# Altium PCB Flow_Pump.PcbDoc (part 3 of 3)
Units mm, origin at the board's own origin, x right, y up, seen from the top; angles counter-clockwise.
Board outline 210 x 210 mm, 2 copper layers (Top Layer, Bottom Layer); 275 components, 189 nets, 896 pads, 730 vias.
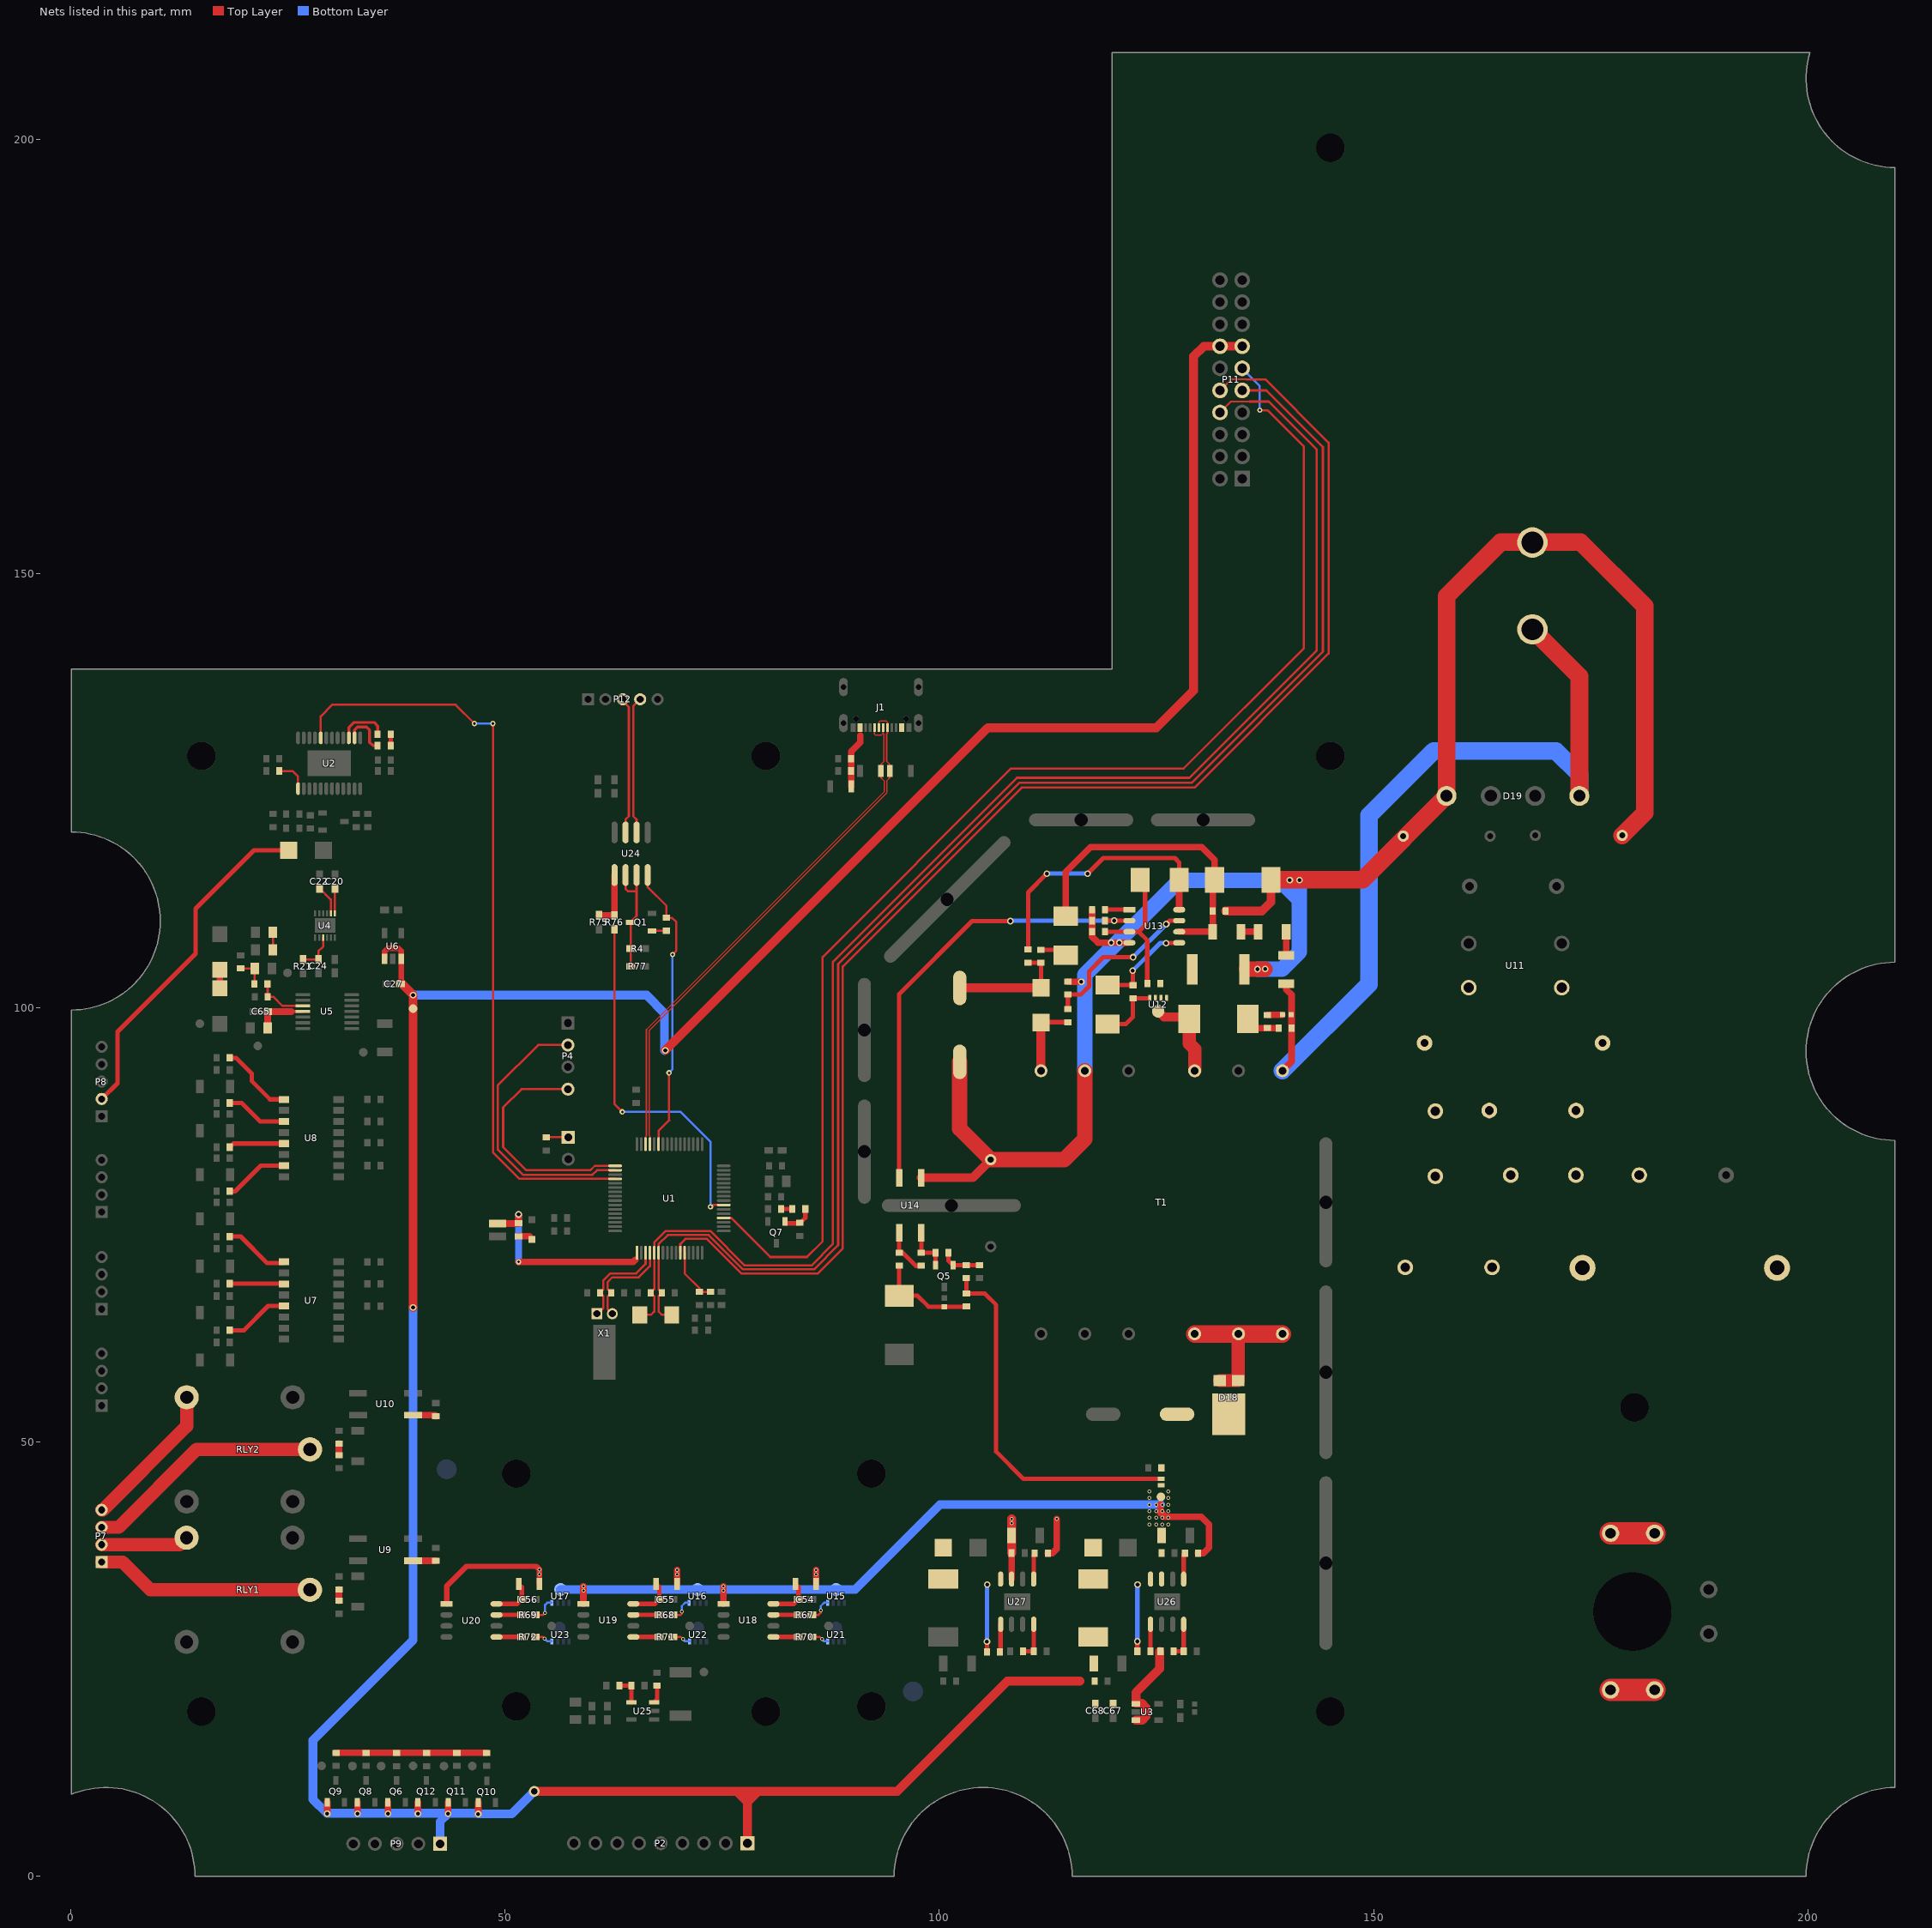
[diagram p3: the nets of this part, all layers, seen from the top]

## Via types
v1: diameter 0.762, hole 0.457, Top Layer to Bottom Layer, tented both sides, 554 vias
v2: diameter 0.61, hole 0.305, Top Layer to Bottom Layer, tented both sides, 99 vias
v3: diameter 0.45, hole 0.25, Top Layer to Bottom Layer, tented both sides, 70 vias
v4: diameter 0.5, hole 0.25, Top Layer to Bottom Layer, 4 vias
v5: diameter 1.5, hole 1, Top Layer to Bottom Layer, 2 vias
v6: diameter 1.27, hole 0.711, Top Layer to Bottom Layer, tented both sides, 1 vias

## Nets (pads, with @x,y where several pads share a name; then routed paths per layer and width w, separated by ;. In a path a pad name is that pad's centre, name@x,y a point inside that pad or via, vN(x,y) a via of type N, cw(c..) or ccw(c..) an arc to the next point about the centre after c; other vN are vias at no path point) (continued)
NetC22_1: C22.1 U4.2 | length 3.5
  Top Layer w0.254: C22.1@28.643,113.685 C22.1@28.643,113.751 29.953,112.441 U4.2@29.953,110.874
NetC23_1: C23.1 R22.1 R23.2 | length 3.4
  Top Layer w0.254: R22.1@19.558,104.521 21.179,104.521 21.179,102.758 R23.2@21.15,102.729
NetC24_1: C24.1 R21.2 U4.9 | length 4.5
  Top Layer w0.254: R21.2@26.738,105.562 C24.1@28.516,105.562 28.516,106.494 29.053,107.031 U4.9@29.053,108.074
NetC25_2: C25.2 R23.1 U5.3 | length 6
  Top Layer w0.254: R23.1@22.65,102.729 22.674,102.706 C25.2@22.674,101.242 23.345,101.242 24.37,100.217 U5.3@26.712,100.217
NetC38_2: C38.2 R42.1 | length 1.3
  Top Layer w0.762: R42.1@30.881,31.731 C38.2@30.881,33.025
NetC39_2: C39.2 R43.1 | length 1.3
  Top Layer w0.762: R43.1@30.881,48.495 C39.2@30.881,49.813
NetC40_1: C40.1 C41.1 D18.3 R61.1 R64.1 T2.1 | length 42.9
  Top Layer w0.508: R64.1@103.122,68.871 103.124,68.869 R61.1@103.124,67.107 105.232,67.107 106.553,65.786 106.553,48.895 109.683,45.765 T2.1@125.553,45.765
NetC42_1: C42.1 C44.1 D19.1 R47.2 R50.2 T1.1 | length 95.3
  Top Layer w0.762: T1.1@139.511,92.747 140.565,93.801 R47.2@140.565,97.663 140.565,101.497 139.952,102.11 R50.2@139.952,102.78
  Top Layer w2.032: C44.1@169.253,142.608 173.705,138.156 D19.1@173.705,124.384
  Bottom Layer w2.032: T1.1@139.511,92.747 149.479,102.715 149.479,122.123 156.921,129.565 170.993,129.565 173.73,126.828 D19.1@173.73,124.308
NetC42_2: C42.2 R51.2 | length 1.7
  Top Layer w0.762: R51.2@137.819,99.187 C42.2@139.511,99.187
NetC45_1: C45.1 C49.1 D21.2 R56.1 U13.6 | length 36.2
  Top Layer w0.762: D21.2@114.554,110.545 114.554,115.621 117.424,118.491 130.226,118.491 131.697,117.02 C49.1@131.697,114.718 131.495,114.516 R56.1@131.495,108.749 U13.6@127.633,108.749
NetC46_1: C46.1 D22.2 R55.1 R57.1 | length 13.7
  Top Layer w0.508: R57.1@110.234,105.193 111.698,105.193 R55.1@111.711,105.18 D22.2@111.711,102.298
  Top Layer w1.016: C46.1@102.36,102.272 102.386,102.298 D22.2@111.711,102.298
NetC47_1: C47.1 U13.1 | length 2.8
  Top Layer w0.508: C47.1@119.1,111.289 U13.1@121.883,111.289
NetC48_1: C48.1 D24.2 R61.2 R63.1 | length 11.7
  Top Layer w0.508: R63.1@95.391,70.292 D24.2@95.391,66.839 97.499,66.839 98.753,65.585 C48.1@100.582,65.585 103.026,65.585 R61.2@103.124,65.683
NetC50_1: C50.1 U13.2 U14.4 | length 52.2
  Top Layer w0.508: U14.4@95.391,80.403 95.391,101.589 103.776,109.974 v1(108.204,109.974) ; C50.1@119.1,110.019 v1(120.142,110.019) U13.2@121.883,110.019
  Bottom Layer w0.508: v1(108.204,109.974) 108.249,110.019 v1(120.142,110.019)
NetC51_1: C51.1 D25.2 R62.2 U13.3 | length 16.8
  Top Layer w0.508: C51.1@119.1,108.749 U13.3@121.883,108.749 122.969,108.749 ; D25.2@123.133,114.718 123.698,114.153 123.698,109.478 122.969,108.749 ; R62.2@123.952,102.78 123.952,107.766 122.969,108.749
NetC52_1: C52.1 Q5.2 R65.2 U14.2 | length 5.4
  Top Layer w0.508: U14.2@97.931,74.078 R65.2@97.931,71.792 C52.1@99.566,71.792 99.566,70.371 Q5.2@99.582,70.355
NetC52_2: C52.2 Q5.1 R64.2 R66.1 | length 4.7
  Top Layer w0.508: C52.2@101.066,71.792 101.066,70.871 Q5.1@101.582,70.355 104.63,70.355 R66.1@104.646,70.371
NetC53_2: C53.2 R73.2 U1.12 | length 6.5
  Top Layer w0.254: U1.12@70.684,71.795 70.684,69.397 72.39,67.691 C53.2@72.39,67.286 R73.2@73.66,67.286
NetC54_2: C54.2 D26.2 U18.8 | length 5
  Top Layer w0.508: U18.8@80.909,31.374 83.281,31.374 C54.2@83.789,31.882 83.789,33.299 D26.2@83.427,33.66
NetC55_2: C55.2 D27.2 U19.8 | length 5.1
  Top Layer w0.508: U19.8@64.78,31.374 67.265,31.374 C55.2@67.773,31.882 67.773,33.299 D27.2@67.412,33.66
NetC56_2: C56.2 D28.2 U20.8 | length 5.1
  Top Layer w0.508: U20.8@49.022,31.369 51.425,31.369 C56.2@51.938,31.882 51.938,33.299 D28.2@51.576,33.66
NetC63_1: C63.1 P3.1 P3.2 R48.2 R49.1 R52.1 U11.2 | length 5.1
  Top Layer w2.54: P3.2@177.292,21.463 P3.1@182.372,21.463
NetC63_2: C63.2 F1.2 R46.2 R48.1 R49.2 U11.1
NetC72_1: C72.1 D29.2 L1.1 U26.8 | length 7.7
  Top Layer w0.508: C72.1@122.809,25.908 v1(122.809,27.051)
  Bottom Layer w0.508: v1(122.809,27.051) 122.809,33.579 v1(122.834,33.604)
NetC72_2: C72.2 U26.1 | length 3.1
  Top Layer w0.508: C72.2@124.309,25.908 124.333,25.932 U26.1@124.333,29.023
NetC77_1: C77.1 D30.2 L2.1 U27.8 | length 7.8
  Top Layer w0.508: C77.1@105.49,25.852 v1(105.49,27.03)
  Bottom Layer w0.508: v1(105.49,27.03) 105.49,33.583 v1(105.512,33.604)
NetC77_2: C77.2 U27.1 | length 3.2
  Top Layer w0.508: C77.2@106.99,25.852 107.061,25.923 U27.1@107.061,29.023
NetD1_2: D1.2 R1.1 | length 1.6
  Top Layer w0.762: R1.1@51.562,73.684 52.808,73.684 D1.2@53.086,73.406
NetD6_2: D6.2 D7.1 | length 2.1
  Top Layer w0.762: D6.2@17.166,102.253 D7.1@17.166,104.376
NetD18_1: D18.1 D18.2 T1.10 T1.11 T1.12 | length 17.6
  Top Layer w1.524: D18.2@132.3,57.079 D18.1@134.4,57.079 134.4,62.386 T1.11@134.461,62.447
  Top Layer w2.032: T1.10@129.411,62.447 T1.11@134.461,62.447 T1.12@139.511,62.447
NetD20_1: D20.1 T1.3 U12.5 | length 10.2
  Top Layer w1.016: U12.5@125.196,99.605 125.868,98.933 128.559,98.933 D20.1@128.776,98.716
  Top Layer w1.524: D20.1@128.776,98.716 128.776,95.887 129.411,95.252 T1.3@129.411,92.747
NetD20_2: D20.2 R47.1 R51.1 | length 4
  Top Layer w0.762: D20.2@135.526,98.716 136.579,97.663 R51.1@137.795,97.663 R47.1@139.065,97.663
NetD21_1: D21.1 R55.2 | length 3.1
  Top Layer w0.508: R55.2@111.711,106.68 113.919,106.68 D21.1@114.554,106.045
NetD22_1: D22.1 R58.1 T1.6 | length 8.7
  Top Layer w0.508: D22.1@111.711,98.298 111.748,98.335 R58.1@114.806,98.335
  Top Layer w1.016: T1.6@111.711,92.747 D22.1@111.711,98.298
NetD23_1: D23.1 R60.1 U12.4 | length 7.2
  Top Layer w0.508: D23.1@119.38,98.116 121.484,98.116 122.301,98.933 R60.1@122.301,101.092 U12.4@124.087,101.092
NetD23_2: D23.2 R60.2 U13.5 | length 11.3
  Top Layer w0.508: D23.2@119.38,102.616 122.277,102.616 R60.2@122.301,102.592 122.276,102.617 v1(122.276,104.267) ; v1(126.111,107.442) 127.596,107.442 U13.5@127.633,107.479
  Bottom Layer w0.508: v1(122.276,104.267) 125.451,107.442 v1(126.111,107.442)
NetD25_1: D25.1 R57.2 U13.8 | length 31.3
  Top Layer w0.508: R57.2@110.234,106.693 110.234,113.282 v1(112.395,115.443) ; v1(117.094,115.443) 118.872,117.221 127.127,117.221 127.633,116.715 D25.1@127.633,114.718 D25.1@127.633,114.3
  Top Layer w0.762: U13.8@127.633,111.289 D25.1@127.633,114.3
  Bottom Layer w0.508: v1(112.395,115.443) v1(117.094,115.443)
NetF1_1: F1.1 P10.1 P10.2 | length 5.1
  Top Layer w2.54: P10.2@177.292,39.497 P10.1@182.372,39.497
NetLED1_1: LED1.1 R15.2 | length 1.3
  Top Layer w0.508: R15.2@36.83,130.175 LED1.1@36.83,131.475
NetLED1_2: LED1.2 U2.3 | length 5.9
  Top Layer w0.33: U2.3@32.025,131.068 32.025,132.265 32.602,132.842 34.925,132.842 35.33,132.437 LED1.2@35.33,131.475
NetP1_1: P1.1 R2.2 | length 2.5
  Top Layer w0.254: R2.2@54.762,85.09 P1.1@57.277,85.09
NetQ1_1: Q1.1 R5.2 | length 1.7
  Top Layer w0.254: Q1.1@66.929,108.842 68.559,108.842 R5.2@68.58,108.863
NetQ7_1: Q7.1 R84.2 R85.1 | length 3.6
  Top Layer w0.508: Q7.1@82.264,75.184 83.947,75.184 84.582,75.819 R84.2@84.582,76.835
NetR1_2: R1.2 SC1.1 U1.1 | length 23.2
  Top Layer w0.254: 65.184,70.993 U1.1@65.184,71.795
  Top Layer w0.762: SC1.1@49.146,75.159 51.537,75.159 R1.2@51.562,75.184 v1(51.562,76.2) ; v2(51.562,70.739) 64.747,70.739 65.001,70.993
  Bottom Layer w0.762: v2(51.562,70.739) v1(51.562,76.2)
NetR15_1: R15.1 U2.2 | length 5.4
  Top Layer w0.33: U2.2@32.675,131.068 32.675,131.984 32.999,132.309 34.061,132.309 34.417,131.953 34.417,130.556 34.798,130.175 R15.1@35.33,130.175
NetR16_1: R16.1 U2.13 | length 3.8
  Top Layer w0.254: R16.1@24.011,127.254 25.527,127.254 26.175,126.606 U2.13@26.175,125.218
NetR17_1: R17.1 R87.2 U26.4 | length 4.3
  Top Layer w0.508: R87.2@126.975,25.908 R17.1@128.143,25.908 U26.4@128.143,29.023
NetR19_1: R19.1 R20.2 | length 2
  Top Layer w0.254: R19.1@23.269,106.664 R20.2@23.269,108.696
NetR26_1: R26.1 U7.1 | length 7.5
  Top Layer w0.508: R26.1@18.304,73.66 19.558,73.66 22.606,70.612 U7.1@24.542,70.612
NetR28_1: R28.1 U8.1 | length 8.7
  Top Layer w0.508: R28.1@18.304,94.234 19.025,94.234 20.828,92.431 20.828,91.567 22.95,89.445 U8.1@24.542,89.445
NetR30_1: R30.1 U7.3 | length 6.3
  Top Layer w0.508: R30.1@18.304,68.236 24.505,68.236 U7.3@24.542,68.199
NetR32_1: R32.1 U8.3 | length 7.1
  Top Layer w0.508: R32.1@18.304,89.027 19.685,89.027 21.807,86.905 U8.3@24.542,86.905
NetR34_1: R34.1 U7.5 | length 7.4
  Top Layer w0.508: R34.1@18.304,62.865 19.939,62.865 22.733,65.659 U7.5@24.542,65.659
NetR36_1: R36.1 U8.5 | length 6.4
  Top Layer w0.508: R36.1@18.304,83.947 18.722,84.365 U8.5@24.542,84.365
NetR40_1: R40.1 U8.7 | length 7.5
  Top Layer w0.508: R40.1@18.304,78.867 18.923,78.867 21.881,81.825 U8.7@24.542,81.825
NetR44_1: R44.1 U9.1 | length 2.6
  Top Layer w0.762: U9.1@39.418,36.327 R44.1@42.037,36.327
NetR45_1: R45.1 U10.1 | length 2.7
  Top Layer w0.762: U10.1@39.418,53.091 41.929,53.091 R45.1@42.037,52.983
NetR46_1: R46.1 R52.2 R53.2
NetR50_1: R50.1 R54.2 | length 2.7
  Top Layer w0.762: R50.1@139.952,106.03 R54.2@139.952,108.749
NetR54_1: R54.1 R56.2 | length 2
  Top Layer w0.762: R56.2@134.745,108.749 R54.1@136.702,108.749
NetR58_2: R58.2 R59.1 U13.7 | length 19
  Top Layer w0.508: R58.2@114.806,99.835 R59.1@114.806,101.51 116.29,101.51 117.246,102.466 117.246,104.167 118.895,105.816 v1(122.326,105.816) ; v1(126.136,109.626) 126.529,110.019 U13.7@127.633,110.019
  Bottom Layer w0.508: v1(122.326,105.816) v1(126.136,109.626)
NetR62_1: R62.1 R81.1 U12.1 U12.2 U12.3
NetR63_2: R63.2 R65.1 U14.1 | length 5.4
  Top Layer w0.508: U14.1@95.391,74.078 R63.2@95.391,71.792 95.792,71.792 97.292,70.292 R65.1@97.931,70.292
NetR67_1: R67.1 U18.7 | length 2.9
  Top Layer w0.508: U18.7@80.909,30.104 R67.1@83.764,30.104
NetR67_2: R67.2 U15.4 | length 2.8
  Top Layer w0.254: R67.2@85.338,30.104 86.106,30.104 86.36,30.358 v3(86.36,30.607)
  Bottom Layer w0.254: v3(86.36,30.607) 86.36,31.12 86.736,31.496 U15.4@87.145,31.496
NetR68_1: R68.1 U19.7 | length 3
  Top Layer w0.508: U19.7@64.78,30.104 R68.1@67.748,30.104
NetR68_2: R68.2 U16.4 | length 2.9
  Top Layer w0.254: R68.2@69.322,30.104 70.231,30.104 70.358,30.231 v3(70.358,30.48)
  Bottom Layer w0.254: v3(70.358,30.48) 70.358,31.12 70.734,31.496 U16.4@71.161,31.496
NetR69_1: R69.1 U20.7 | length 2.9
  Top Layer w0.508: U20.7@49.022,30.099 51.908,30.099 R69.1@51.913,30.104
NetR69_2: R69.2 U17.4 | length 3
  Top Layer w0.254: R69.2@53.487,30.104 54.361,30.104 v3(54.61,30.353)
  Bottom Layer w0.254: v3(54.61,30.353) 54.61,31.247 54.859,31.496 U17.4@55.413,31.496
NetR70_1: R70.1 U18.5 | length 2.9
  Top Layer w0.508: U18.5@80.909,27.564 R70.1@83.764,27.564
NetR70_2: R70.2 U21.4 | length 2
  Top Layer w0.254: R70.2@85.364,27.564 86.228,27.564 v3(86.487,27.305)
  Bottom Layer w0.254: v3(86.487,27.305) 86.741,27.051 U21.4@87.145,27.051
NetR71_1: R71.1 U19.5 | length 3
  Top Layer w0.508: U19.5@64.78,27.564 R71.1@67.748,27.564
NetR71_2: R71.2 U22.4 | length 2.1
  Top Layer w0.254: R71.2@69.362,27.564 70.226,27.564 v3(70.485,27.305)
  Bottom Layer w0.254: v3(70.485,27.305) 70.739,27.051 U22.4@71.288,27.051
NetR72_1: R72.1 U20.5 | length 2.9
  Top Layer w0.508: U20.5@49.022,27.559 51.908,27.559 R72.1@51.913,27.564
NetR72_2: R72.2 U23.4 | length 2.1
  Top Layer w0.254: R72.2@53.487,27.564 54.351,27.564 v3(54.559,27.356)
  Bottom Layer w0.254: v3(54.559,27.356) 54.864,27.051 U23.4@55.413,27.051
NetR78_2: R78.2 R79.1 U25.4 | length 3.3
  Top Layer w0.508: R79.1@63.167,21.96 R78.2@64.558,21.96 U25.4@64.558,20.039
NetR80_1: R80.1 U25.3 | length 2.1
  Top Layer w0.508: U25.3@67.158,20.039 67.509,20.39 R80.1@67.509,21.96
NetR83_2: R83.2 R84.1 | length 1.3
  Top Layer w0.508: R83.2@81.788,76.835 R84.1@83.082,76.835
NetR88_1: R88.1 U26.5 | length 3.1
  Top Layer w0.508: U26.5@128.143,34.223 128.143,37.06 R88.1@128.294,37.211
NetR89_1: R89.1 R90.2 U27.4 | length 4.3
  Top Layer w0.508: R90.2@109.653,25.908 R89.1@110.871,25.908 U27.4@110.871,29.023
NetR91_1: R91.1 U27.5 | length 3
  Top Layer w0.508: U27.5@110.871,34.223 110.871,37.084 R91.1@110.998,37.211
op_3.3v: C65.1 FB2.2 U5.4 | length 5.9
  Top Layer w0.33: 25.385,99.552 25.4,99.567 U5.4@26.712,99.567
  Top Layer w0.762: FB2.2@22.674,97.662 C65.1@22.674,99.552 25.385,99.552
osc_in: C5.1 U1.3 X1.2 | length 11.2
  Top Layer w0.254: X1.2@60.796,64.86 61.341,65.405 61.341,66.802 C5.1@60.96,67.183 61.341,67.564 61.341,68.617 62.142,69.418 65.1,69.418 66.184,70.502 U1.3@66.184,71.795
osc_out: C6.1 U1.4 X1.1 | length 11.4
  Top Layer w0.254: X1.1@62.357,64.77 61.812,65.315 61.812,66.765 C6.1@62.23,67.183 61.798,67.615 61.798,68.402 62.357,68.961 65.405,68.961 66.684,70.24 U1.4@66.684,71.795
PGND: C43.1 C44.2 C45.2 C46.2 C47.2 C49.2 C50.2 C51.2 C58.2 C64.2 D19.4 R59.2 R81.2 T1.5 U13.4 U14.3 | length 221
  Top Layer w0.762: R59.2@114.806,103.01 114.819,102.997 v1(116.357,102.997) ; C47.2@117.6,111.289 C50.2@117.6,110.019 C51.2@117.6,108.749 117.6,108.181 118.302,107.479 U13.4@121.883,107.479
  Top Layer w1.016: U14.3@97.931,80.428 103.844,80.428 C64.2@105.918,82.502 ; C45.2@132.969,111.125 137.16,111.125 138.197,112.162 C49.2@138.197,114.718
  Top Layer w1.778: C46.2@102.36,93.772 102.36,86.06 C64.2@105.918,82.502 114.379,82.502 116.761,84.884 T1.5@116.761,92.747 ; R81.2@135.382,104.431 135.396,104.445 v1@137.516,104.445
  Top Layer w2.032: C49.2@138.197,114.718 148.739,114.718 158.43,124.409 158.43,147.381 164.661,153.612 173.845,153.612 181.229,146.228 181.229,122.432 C43.1@178.634,119.837
  Bottom Layer w1.778: T1.5@116.761,92.747 116.761,103.789 127.653,114.681 v1(140.36,114.681) v1(141.478,114.681) 141.478,106.426 139.483,104.431 139.469,104.445 v1(136.652,104.445) ; 139.268,114.63 141.263,112.635
  other v1: 137.516,104.47 119.812,107.493 120.726,107.493
relay_A1: P7.3 RLY2.5 | length 27.7
  Top Layer w1.524: P7.3@3.556,40.186 5.515,40.186 14.478,49.149 RLY2.5@27.547,49.149
relay_A2: P7.1 RLY1.5 | length 25.3
  Top Layer w1.524: P7.1@3.556,36.186 5.978,36.186 9.174,32.99 RLY1.5@27.535,32.99
relay_B1: P7.4 RLY2.2 | length 17.1
  Top Layer w1.524: P7.4@3.556,42.186 3.705,42.186 13.347,51.828 RLY2.2@13.347,55.148
relay_B2: P7.2 RLY1.2 | length 10.1
  Top Layer w1.524: P7.2@3.556,38.186 12.532,38.186 RLY1.2@13.335,38.989
RS232RX/485-_N: P12.3 U24.7 | length 15.8
  Top Layer w0.254: P12.3@63.564,135.509 63.564,135.318 64.262,134.62 64.262,122.047 63.881,121.666 U24.7@63.881,120.179
RS232TX/485+_P: P12.4 U24.6 | length 15.8
  Top Layer w0.254: U24.6@65.151,120.179 65.151,121.666 64.77,122.047 64.77,134.715 P12.4@65.564,135.509
RS485_DIR: Q1.3 R4.1 R77.2 U24.2 U24.3 | length 13.8
  Top Layer w0.254: U24.2@63.881,115.279 63.881,113.665 64.135,113.411 65.151,113.411 ; R77.2@64.491,104.775 R4.1@64.491,106.807 64.491,109.78 Q1.3@64.429,109.842 65.151,110.564 65.151,113.411 ; U24.3@65.151,115.279 65.151,113.411
RUN: P11.10 U1.11 | length 166.4
  Top Layer w0.203: P11.10@132.334,171.069 133.604,172.339 135.416,172.339
  Top Layer w0.254: U1.11@70.184,71.795 70.184,72.789 70.775,73.381 73.254,73.381 77.241,69.393 86.004,69.393 88.9,72.288 88.9,104.75 109.499,125.349 129.388,125.349 144.831,140.792 144.831,165.049 137.541,172.339 135.416,172.339
RX_5V: R75.1 R76.1 U24.1 | length 6.5
  Top Layer w0.762: R75.1@60.833,110.642 62.586,110.642 R76.1@62.611,110.617 U24.1@62.611,115.279
SCLK_AO: U1.52 U2.8 | length 88.5
  Top Layer w0.254: U2.8@28.775,131.068 28.775,133.55 30.099,134.874 44.323,134.874 v2(46.482,132.715) ; v2(48.616,132.715) 48.616,83.337 51.658,80.295 U1.52@62.684,80.295
  Bottom Layer w0.254: v2(46.482,132.715) v2(48.616,132.715)
SIOUT0: D5.2 P8.2 | length 39.9
  Top Layer w0.508: P8.2@3.556,89.494 5.372,91.31 5.372,97.218 14.376,106.223 14.376,111.404 21.082,118.11 D5.2@25.083,118.11
SW1: C1.1 P11.8 U1.5 Y1.1 | length 174
  Top Layer w0.203: P11.8@132.334,168.529 133.59,169.785 135.763,169.785
  Top Layer w0.254: Y1.1@65.509,64.643 66.802,64.643 67.183,65.024 67.183,66.788 C1.1@66.788,67.183 67.184,67.579 U1.5@67.184,71.795 67.184,72.969 68.51,74.295 73.635,74.295 77.597,70.333 85.279,70.333 87.757,72.811 87.757,105.283 108.941,126.467 128.803,126.467 143.459,141.122 143.459,164.262 137.936,169.785 135.763,169.785
SW2: C2.1 P11.9 U1.6 Y1.2 | length 172.3
  Top Layer w0.254: Y1.2@69.209,64.643 68.072,64.643 67.691,65.024 67.691,66.825 C2.1@68.049,67.183 67.684,67.548 U1.6@67.684,71.795 67.684,72.779 68.743,73.838 73.457,73.838 77.419,69.875 85.573,69.875 88.362,72.665 88.362,105.024 109.22,125.882 129.057,125.882 144.17,140.995 144.17,164.567 137.668,171.069 P11.9@134.874,171.069
SWCLK: P4.2 U1.50 | length 32.3
  Top Layer w0.254: P4.2@57.252,95.707 53.818,95.707 49.149,91.038 49.149,83.693 52.07,80.772 60.071,80.772 60.591,81.292 62.684,81.292 U1.50@62.684,81.295
SWD: P4.4 U1.49 | length 27.1
  Top Layer w0.254: P4.4@57.252,90.627 51.892,90.627 49.784,88.519 49.784,83.947 52.436,81.295 59.832,81.295 60.332,81.795 U1.49@62.684,81.795
uart1_rx: R76.2 U1.23 | length 42.1
  Top Layer w0.254: R76.2@62.611,109.043 62.611,88.9 v2(63.5,88.011) ; v2(73.66,77.089) 73.866,77.295 U1.23@75.184,77.295
  Bottom Layer w0.254: v2(63.5,88.011) 70.231,88.011 73.66,84.582 v2(73.66,77.089)
uart1_tx: R5.1 U1.43 U24.4 | length 33.6
  Top Layer w0.254: U24.4@66.421,115.279 66.421,113.896 68.58,111.737 R5.1@68.58,110.363 69.215,110.363 69.723,109.855 69.723,106.553 v2(69.291,106.121) ; U1.43@67.684,84.295 67.684,85.82 68.91,87.046 68.885,87.071 v2(68.885,92.507)
  Bottom Layer w0.254: v2(68.885,92.507) 69.291,92.913 v2(69.291,106.121)
USB_N: D3.2 J1.A7 J1.B7 U1.45 | length 62
  Top Layer w0.152: U1.45@66.684,84.295 66.684,85.171 66.586,85.269 66.586,97.356 93.953,124.723 93.953,126.136 94.32,126.503 D3.2@94.32,127.254 94.32,128.005 93.943,128.382 93.943,131.518 94.041,131.615 J1.B7@94.041,132.232 94.041,132.883 93.929,132.994 93.167,132.994 93.041,132.868 J1.A7@93.041,132.232
USB_P: D4.2 J1.A6 J1.B6 U1.46 | length 61.5
  Top Layer w0.152: U1.46@66.184,84.295 66.184,85.171 66.282,85.269 66.282,97.483 93.648,124.849 93.648,126.136 93.281,126.503 D4.2@93.281,127.254 93.281,128.005 93.639,128.363 93.639,131.518 93.541,131.615 ; J1.B6@92.541,132.232 92.541,131.512 92.685,131.369 93.294,131.369 93.541,131.615 ; J1.A6@93.541,132.232 93.541,131.615
V_Power: C71.1 C73.2 C76.1 C78.2 D26.1 D27.1 D28.1 R88.2 R91.2 T2.2 T4.1 U15.5 U16.5 U17.5 U18.1 U19.1 U20.1 U26.7 U27.7 | length 118.8
  Top Layer w0.635: U20.1@43.272,31.369 43.272,33.391 45.568,35.687 53.594,35.687 v3(53.976,35.305) D28.1@53.976,33.66
  Top Layer w0.762: U19.1@59.03,31.374 v3(59.03,33.401) ; D27.1@69.812,33.66 v3(69.812,35.268) ; U18.1@75.159,31.374 v3(75.159,33.401) ; D26.1@85.827,33.66 v3(85.827,35.268) ; U27.7@108.331,34.223 C78.2@108.331,37.221 ; R91.2@112.498,37.211 113.03,37.211 113.538,37.719 v3(113.538,41.148) ; 125.476,41.783 v3@125.476,42.799 ; 125.67,41.783 126.051,41.402 ; 125.857,41.402 130.175,41.402 131.064,40.513 131.064,37.846 130.429,37.211 R88.2@129.794,37.211
  Top Layer w1.016: C78.2@108.331,37.221 C76.1@108.331,39.253 v3(108.331,41.148)
  Bottom Layer w1.016: U17.5@56.388,33.026 U15.5@88.12,33.026 90.303,33.026 100.076,42.799 v3@125.476,42.799
  other v3: 59.03,32.893 75.159,32.893 53.975,34.798 69.812,34.798 85.827,34.798 124.206,40.513 124.968,40.513 125.67,40.513 126.365,40.513 108.331,40.64 124.206,41.275 124.968,41.275 125.67,41.275 126.365,41.275 124.206,42.037 124.968,42.037 125.67,42.037 126.365,42.037 124.206,42.799 124.968,42.799 125.67,42.799 126.365,42.799 124.206,43.561 126.365,43.561 124.206,44.323 126.365,44.323
V_REF: C20.1 U4.1 | length 2.9
  Top Layer w0.254: U4.1@30.403,110.874 30.403,113.733 C20.1@30.421,113.751
VCC_5V: C27.1 C67.1 C68.1 C74.2 C75.1 L1.2 P2.1 P9.1 P11.13 P11.14 Q6.1 Q8.1 Q9.1 Q10.1 Q11.1 Q12.1 R87.1 T6.1 U3.1 U3.3 U6.1 U6.3 | length 390.1
  Top Layer w0.635: U6.1@36.138,105.623 36.138,106.47 36.5,106.832 37.744,106.832 38.038,106.539 U6.3@38.038,105.623 C27.1@38.038,102.822
  Top Layer w0.762: v1(29.531,7.223) Q9.1@29.531,8.543 ; v1(33.01,7.223) Q8.1@33.01,8.543 ; v1(36.516,7.223) Q6.1@36.516,8.543 ; v1(39.968,7.223) Q12.1@39.968,8.543 ; v1(43.45,7.223) Q11.1@43.45,8.543 ; v1(46.914,7.183) Q10.1@46.914,8.503
  Top Layer w1.016: C27.1@38.038,102.822 v1(39.421,101.439) T6.1@39.421,99.898 v1(39.421,65.507) ; v6(53.365,9.779) 78.003,9.779 ; v1@68.478,95.123 105.588,132.232 124.993,132.232 129.286,136.525 129.286,174.981 130.454,176.149 P11.14@132.334,176.149 P11.13@134.874,176.149 ; 76.683,9.779 77.918,8.543 79.154,9.779 ; P2.1@77.92,3.81 77.92,9.696 78.003,9.779 ; 116.205,22.479 107.848,22.479 95.148,9.779 78.003,9.779 ; U3.3@122.652,17.973 123.383,17.973 123.825,18.415 123.825,19.431 123.317,19.939 122.652,19.939 122.652,21.179 125.373,23.9 R87.1@125.373,25.908
  Bottom Layer w1.016: v1(39.421,65.507) 39.421,27.203 27.889,15.672 27.889,8.865 29.489,7.264 v1@46.965,7.264 ; v1(39.421,101.439) 66.303,101.439 68.351,99.391 v1@68.351,95.072 ; P9.1@42.527,3.75 42.527,6.3 v1(43.45,7.223) ; v1(46.914,7.183) 50.77,7.183 v6(53.365,9.779)
  other v1: 68.453,95.072
VCC_MCU_3.3V: R24.1 R38.1 R39.1 R92.1 R93.1 R94.1 | length 17.3
  Top Layer w0.762: R39.1@30.531,14.218 R38.1@34.01,14.218 R93.1@44.45,14.218 R92.1@47.875,14.218
VUSB: C3.2 C4.2 D2.2 J1.A4 J1.A9 J1.B4 J1.B9 | length 6.3
  Top Layer w0.762: D2.2@89.862,125.476 C4.2@89.862,127.254 C3.2@89.862,128.651 89.862,129.511 90.891,130.54 90.891,131.334
WARN: P11.11 U1.20 | length 152.8
  Top Layer w0.254: U1.20@75.184,75.795 76.046,75.795 80.54,71.301 84.763,71.301 86.563,73.101 86.563,105.842 108.255,127.533 128.143,127.533 141.986,141.376 141.986,164.592 137.795,168.783 v2(136.906,168.783)
  Bottom Layer w0.254: P11.11@135.128,173.609 P11.11@134.874,173.609 136.906,171.577 v2(136.906,168.783)
pads on no net: C7.0 C20.0 C21.0 C22.0 C24.0 C27.0 C29.0 C54.0 C55.0 C56.0 C60.0 C61.0 C62.0 C65.0 C66.0 C67.0 C68.0 C69.0 C70.0 J1.2 J1.A5 J1.A8 J1.B5 J1.B8 P6.1 P8.3 P8.4 P8.5 P12.2 P12.5 R4.0 R21.0 R67.0 R68.0 R69.0 R70.0 R71.0 R72.0 R75.0 R76.0 R77.0 RLY1.3 RLY2.3 T1.2 T1.4 U2.6 U2.17 U2.18 U2.23 U2.25 U3.4 U5.5 U5.6 U5.7 U5.8 U5.9 U5.10 U5.12 U5.13 U5.14 U6.4 U7.7 U7.8 U7.9 U7.10 U26.2 U26.3 U27.2 U27.3 X1.3

## Polygon pours and split planes (outlines as drawn)
GND on Bottom Layer "Top Layer-No Net" (solid, remove dead copper, pour order 8): 0.051,96.135 51.308,96.139 51.308,138.989 119.881,138.984 119.881,209.984 146.761,209.984 146.761,140.487 131.216,124.943 130.251,123.977 115.519,123.977 110.439,123.977 90.602,104.14 90.145,103.683 90.145,76.327 108.788,76.327 108.788,59.563 108.814,59.538 138.582,59.538 138.582,9.068 138.582,-0.016 0.067,-0.016 0.051,0
AGND on Bottom Layer "Top Layer-No Net" (solid, remove dead copper, pour order 4): 0.055,138.984 50.343,138.984 50.343,97.053 0.055,97.053
GND on Top Layer "Top Layer-No Net" (solid, remove dead copper, pour order 6): 0.051,96.135 51.308,96.139 51.308,138.989 119.881,138.984 119.881,209.984 146.761,209.984 146.761,140.487 131.216,124.943 130.251,123.977 115.519,123.977 110.439,123.977 90.602,104.14 90.145,103.683 90.145,76.327 108.788,76.327 108.788,59.563 108.814,59.538 138.582,59.538 138.582,9.068 138.582,-0.016 0.067,-0.016 0.051,0
AGND on Top Layer "Top Layer-No Net" (solid, remove dead copper, pour order 0): 0.055,138.984 50.343,138.984 50.343,97.053 0.055,97.053

## Keep-outs
Keep-Out Layer:
  circle w0.152: c15.055,128.984 r4.5
  circle w0.152: c80.055,128.984 r4.5
  circle w0.152: c145.055,128.984 r4.5
  circle w0.152: c145.055,198.984 r4.5
  circle w0.152: c180.055,53.984 r4.5
  circle w0.152: c145.055,18.984 r4.5
  circle w0.152: c80.055,18.984 r4.5
  circle w0.152: c15.055,18.984 r4.5
  circle w0.152: c51.281,46.355 r3
  circle w0.152: c92.202,46.355 r3
  circle w0.152: c51.281,19.558 r3
  circle w0.152: c92.202,19.558 r3
  lines w0.152: 119.881,138.984 0.055,138.984 0.055,120.234 ; 119.881,138.984 119.881,209.984 200.258,209.984 200.254,209.984 ccw(c210.055,206.984) 210.055,196.734 210.055,196.746 210.055,105.234 ; 0.055,99.734 ccw(c0.055,109.984) 0.055,120.234 ; 0.055,99.734 0.055,99.734 ; 0.055,99.734 0.055,9.421 cw(c4.055,-0.016) 14.305,-0.016 ; 0.055,120.234 0.055,120.234 ; 14.305,-0.016 14.305,-0.016 ; 14.305,-0.016 94.805,-0.016 94.805,-0.016 cw(c105.055,-0.016) 115.305,-0.016 ; 115.305,-0.016 115.305,-0.016 ; 115.305,-0.016 199.805,-0.016 ; 199.805,-0.016 cw(c210.055,-0.016) 210.055,10.234 ; 199.805,-0.016 199.805,-0.016 ; 210.055,10.234 210.055,10.234 ; 210.055,10.234 210.055,84.734 ; 210.055,84.734 cw(c210.055,94.984) 210.055,105.234 ; 210.055,84.734 210.055,84.734 ; 210.055,105.234 210.055,105.234

## Other copper
Top Layer:
  rectangle net GND: 107.366,57.912 123.114,63.932
  rectangle net VUSB: 90.602,131.334 91.186,132.364
  region net NetC63_2: 170.282,72.568 169.443,71.73 163.424,71.73 162.408,70.714 162.408,68.529 163.271,67.666 174.472,67.666 175.895,69.089 175.895,92.685 177.495,94.285 177.495,97.815 175.895,99.415 175.895,102.87 175.006,103.759 171.018,103.759 170.282,103.022
  region net NetF1_1: 174.854,38.151 175.539,37.465 193.421,37.465 199.238,43.282 199.238,71.755 198.349,72.644 194.92,72.644 193.904,71.628 193.904,45.923 189.992,42.012 175.666,42.012 174.854,41.199
  region net NetC63_1: 153.492,97.739 153.492,91.237 147.98,85.725 147.98,34.265 163.322,18.923 183.083,18.923 184.023,19.863 184.023,22.606 183.032,23.597 166.573,23.597 153.06,37.109 153.06,66.192 155.27,68.402 155.27,71.222 153.06,73.431 153.06,83.718 155.677,86.335 163.855,86.335 164.643,87.122 164.643,89.585 163.88,90.348 158.928,90.348 157.937,91.338 157.937,96.291 162.674,101.028 162.674,102.502 161.442,103.734 159.487,103.734
  region net GND: 96.19,132.715 96.19,126.594 96.342,126.403 96.71,126.403 96.926,126.403 97.511,126.987 97.511,130.81 96.774,131.547 96.774,132.715
  region net 24V_F: 13.843,58.57 14.247,58.166 16.891,58.166 17.272,58.547 17.272,94.869 16.891,95.25 14.478,95.25 13.843,94.615
  region net V_Power: 124.079,45.212 126.492,45.212 126.746,44.958 126.746,38.481 126.111,37.846 126.111,33.528 125.857,33.274 125.349,33.274 125.095,33.528 125.095,35.433 123.825,36.703 123.825,44.958
  region net NetC40_1: 125.159,54.933 125.158,50.61 125.158,45.529 125.92,45.529 127.19,45.529 128.397,46.736 128.397,48.006 128.397,49.847 129.19,50.609 135.572,50.609 136.207,51.244 136.207,55.441 135.953,55.695 125.92,55.695
  region net AC_L: 167.183,117.424 168.732,115.875 168.732,107.086 169.471,106.347 172.844,106.347 173.685,107.188 173.685,117.653 170.155,121.183 170.155,124.993 169.41,125.738 167.877,125.738 167.183,125.044
  region net AC_N: 158.547,117.678 158.547,107.086 159.389,106.244 162.353,106.244 163.474,107.366 163.474,115.875 164.973,117.373 164.973,125.07 164.33,125.712 162.542,125.712 161.95,125.12 161.95,121.082
  region net NetD20_1: 123.698,97.536 124.333,96.901 127.381,96.901 127.889,96.393 127.889,92.329 128.397,91.821 130.302,91.821 130.937,92.456 130.937,100.076 130.302,100.711 127.484,100.711 127.103,100.33 123.952,100.33 123.698,100.076
  region net NetR62_1: 124.714,100.711 126.365,100.711 126.619,100.965 126.619,101.999 126.873,102.253 128.117,102.253 129.939,102.253 130.302,102.616 130.302,106.172 130.048,106.426 128.27,106.426 128.016,106.172 128.016,105.41 128.016,104.521 127.753,104.258 125.34,104.258 124.714,103.632
  region net NetC77_1: 98.298,38.735 98.298,33.371 98.776,32.893 107.061,32.893 107.442,33.274 107.442,35.179 106.934,35.687 102.616,35.687 101.854,36.449 101.854,38.862 101.473,39.243 98.806,39.243
  region net NetC72_1: 115.57,38.735 115.57,33.371 116.048,32.893 124.333,32.893 124.714,33.274 124.714,35.179 124.206,35.687 119.888,35.687 119.126,36.449 119.126,38.862 118.745,39.243 116.078,39.243
  region net 24V_F: 98.298,22.225 98.806,21.717 100.823,21.717 101.092,21.986 101.092,24.638 102.489,26.035 102.489,28.829 102.235,29.083 98.547,29.083 98.298,28.834
  region net VCC_5V: 115.57,19.839 116.092,19.318 118.237,19.318 120.921,19.318 121.158,19.555 123.193,19.555 123.32,19.682 123.32,20.039 123.32,20.577 123.193,20.704 118.745,20.704 118.364,21.085 118.364,24.638 119.761,26.035 119.761,28.829 119.507,29.083 115.819,29.083 115.57,28.834
  region net ISEN: 75.692,22.86 76.835,24.003 89.916,24.003 90.297,24.384 90.297,26.416 89.916,26.797 89.281,26.797 86.714,26.797 56.134,26.797 55.638,26.301 55.638,23.876 56.654,22.86
  region net VUSB: 90.728,132.245 90.716,132.257 90.716,132.88 91.91,134.074 94.666,134.074 95.923,132.817 95.923,132.34 95.828,132.245 95.528,132.245 95.528,132.627 94.767,133.388 91.808,133.388 91.173,132.753 91.173,132.245 90.728,132.245 90.716,132.257 90.716,132.88
  region net NetD18_1: 128.118,62.84 128.118,58.217 130.048,56.286 139.141,56.286 141.097,58.242 141.097,62.992 139.929,64.16 129.438,64.16
Bottom Layer:
  region net NetR46_1: 155.778,76.556 157.988,74.346 180.01,74.346 182.093,76.429 182.093,81.026 181.382,81.737 179.755,81.737 179.095,81.077 179.095,77.724 178.359,76.987 168.072,76.987 167.259,77.8 167.259,81.026 166.548,81.737 164.973,81.737 164.287,81.051 164.287,77.749 163.525,76.987 159.233,76.988 158.471,77.749 158.471,81.229 157.963,81.737 156.286,81.737 155.778,81.229
  region net V_Power: 53.467,33.02 54.102,32.385 92.583,32.385 99.761,39.563 126.05,39.563 127.635,41.148 127.635,44.196 126.746,45.085 97.409,45.085 90.297,37.973 54.864,37.973 53.467,36.576
  region net Motor_W: 55.88,31.877 57.531,31.877 57.785,31.882 58.039,31.623 58.039,28.194 57.785,27.94 55.245,27.94 55.118,28.067 55.118,30.607 55.245,30.734 55.626,30.734 55.88,30.988
  region net Motor_V: 71.653,31.877 73.39,31.877 73.644,31.882 73.898,31.623 73.898,28.194 73.644,27.94 71.104,27.94 70.977,28.067 70.977,30.607 71.104,30.734 71.399,30.734 71.653,30.988
  region net Motor_U: 87.612,31.877 89.263,31.877 89.517,31.882 89.771,31.623 89.771,28.194 89.517,27.94 86.977,27.94 86.85,28.067 86.85,30.607 86.977,30.734 87.358,30.734 87.612,30.988
  region net ISEN: 55.88,24.821 56.111,24.59 57.61,24.59 57.912,24.892 57.912,27.432 57.785,27.559 56.007,27.559 55.88,27.432
  region net ISEN: 71.714,24.821 71.945,24.59 73.444,24.59 73.746,24.892 73.746,27.432 73.619,27.559 71.841,27.559 71.714,27.432
  region net ISEN: 87.612,24.821 87.843,24.59 89.342,24.59 89.644,24.892 89.644,27.432 89.517,27.559 87.739,27.559 87.612,27.432

## Silkscreen, mask and mechanical layers (free items; w line width, h text height)
Top Overlay:
  text "Flow_Pump_V1.0" at 148.565,185.674 h5.08
  text "20241020" at 148.59,179.68 h5.08
  text "GND" at 59.969,129.159 h1.52 r90
  text "NC" at 62.001,129.134 h1.52 r90
  text "485A" at 64.008,129.134 h1.52 r90
  text "485B" at 66.015,129.108 h1.52 r90
  text "NC" at 68.072,129.108 h1.52 r90
  text "NC" at 7.468,95.052 h1.52
  text "NC" at 7.468,93.052 h1.52
  text "NC" at 7.468,91.052 h1.52
  text "AO" at 7.468,89.052 h1.52
  text "AGND" at 7.468,87.052 h1.52
  text "AGND" at 7.468,82.035 h1.52
  text "AI" at 7.468,80.035 h1.52
  text "DI0" at 7.468,78.035 h1.52
  text "DI1" at 7.468,76.035 h1.52
  text "DI2" at 7.468,70.859 h1.52
  text "DI3" at 7.468,68.859 h1.52
  text "GND" at 7.468,66.859 h1.52
  text "NC" at 7.468,64.859 h1.52
  text "DI4" at 7.468,59.747 h1.52
  text "DI5" at 7.468,57.747 h1.52
  text "DI6" at 7.468,55.747 h1.52
  text "GND" at 6.756,53.746 h1.52
  text "B1" at 7.468,41.744 h1.52
  text "A1" at 7.468,39.744 h1.52
  text "B2" at 7.468,37.744 h1.52
  text "A2" at 7.468,35.744 h1.52
  text "W" at 60.861,7.722 h1.52 r90
  text "V" at 63.361,7.722 h1.52 r90
  text "U" at 65.861,7.722 h1.52 r90
  text "GND" at 68.362,7.722 h1.52 r90
  text "HW" at 70.861,7.722 h1.52 r90
  text "HV" at 73.228,7.722 h1.52 r90
  text "HU" at 75.946,7.722 h1.52 r90
  text "5V" at 78.384,7.722 h1.52 r90
  text "PE" at 58.344,7.62 h1.52 r90
  text "EZ" at 24.536,2.946 h1.52 r90
  text "EB" at 25.73,2.946 h1.52 r90
  text "EA" at 26.924,2.946 h1.52 r90
  text "GND" at 28.219,2.946 h1.52 r90
  text "5V" at 29.413,2.921 h1.52 r90
Bottom Solder:
  lines w1.016: 56.515,29.464 59.055,29.464 60.42,28.099 60.42,3.81 ; 62.92,3.81 62.92,28.122 64.008,29.21 71.628,29.21 ; 65.42,3.81 65.42,16.499 70.231,21.311 74.524,21.311 82.55,29.337 87.757,29.337
Mechanical 1:
  lines w0.152: 0.055,9.421 cw(c4.055,-0.016) 14.305,-0.016 94.805,-0.016 ; 0.055,9.426 0.055,99.734 ccw(c0.055,109.984) 0.055,120.234 0.055,138.984 106.378,138.984 119.881,138.984 ; 94.805,-0.016 cw(c105.055,-0.016) 115.305,-0.016 199.805,-0.016 cw(c210.055,-0.016) 210.055,10.234 210.055,84.734 cw(c210.055,94.984) 210.055,105.234 210.055,196.746 ; 119.881,138.984 119.881,209.984 200.258,209.984 ; 200.254,209.984 ccw(c210.055,206.984) 210.055,196.734

## Text inside footprints (layer, text, board x,y; h text height)
C44: Top Overlay "+" at 169.486,138.354 h1.02 r90
D19: Top Overlay "+" at 172.785,126.169 h1.02; Top Overlay "~" at 167.705,126.215 h1.02; Top Overlay "~" at 162.625,126.215 h1.02; Top Overlay "-" at 157.546,126.035 h1.02
SC1: Top Overlay "-" at 48.788,72.659 h1.02; Top Overlay "+" at 48.788,76.408 h1.02